# Altium PCB AdamPannel.PcbDoc (part 1 of 3)
Units mil, origin at the board's own origin, x right, y up, seen from the top; angles counter-clockwise.
Board outline 4173.23 x 3149.71 mil, 2 copper layers (Top Layer, Bottom Layer); 88 components, 73 nets, 388 pads, 166 vias.
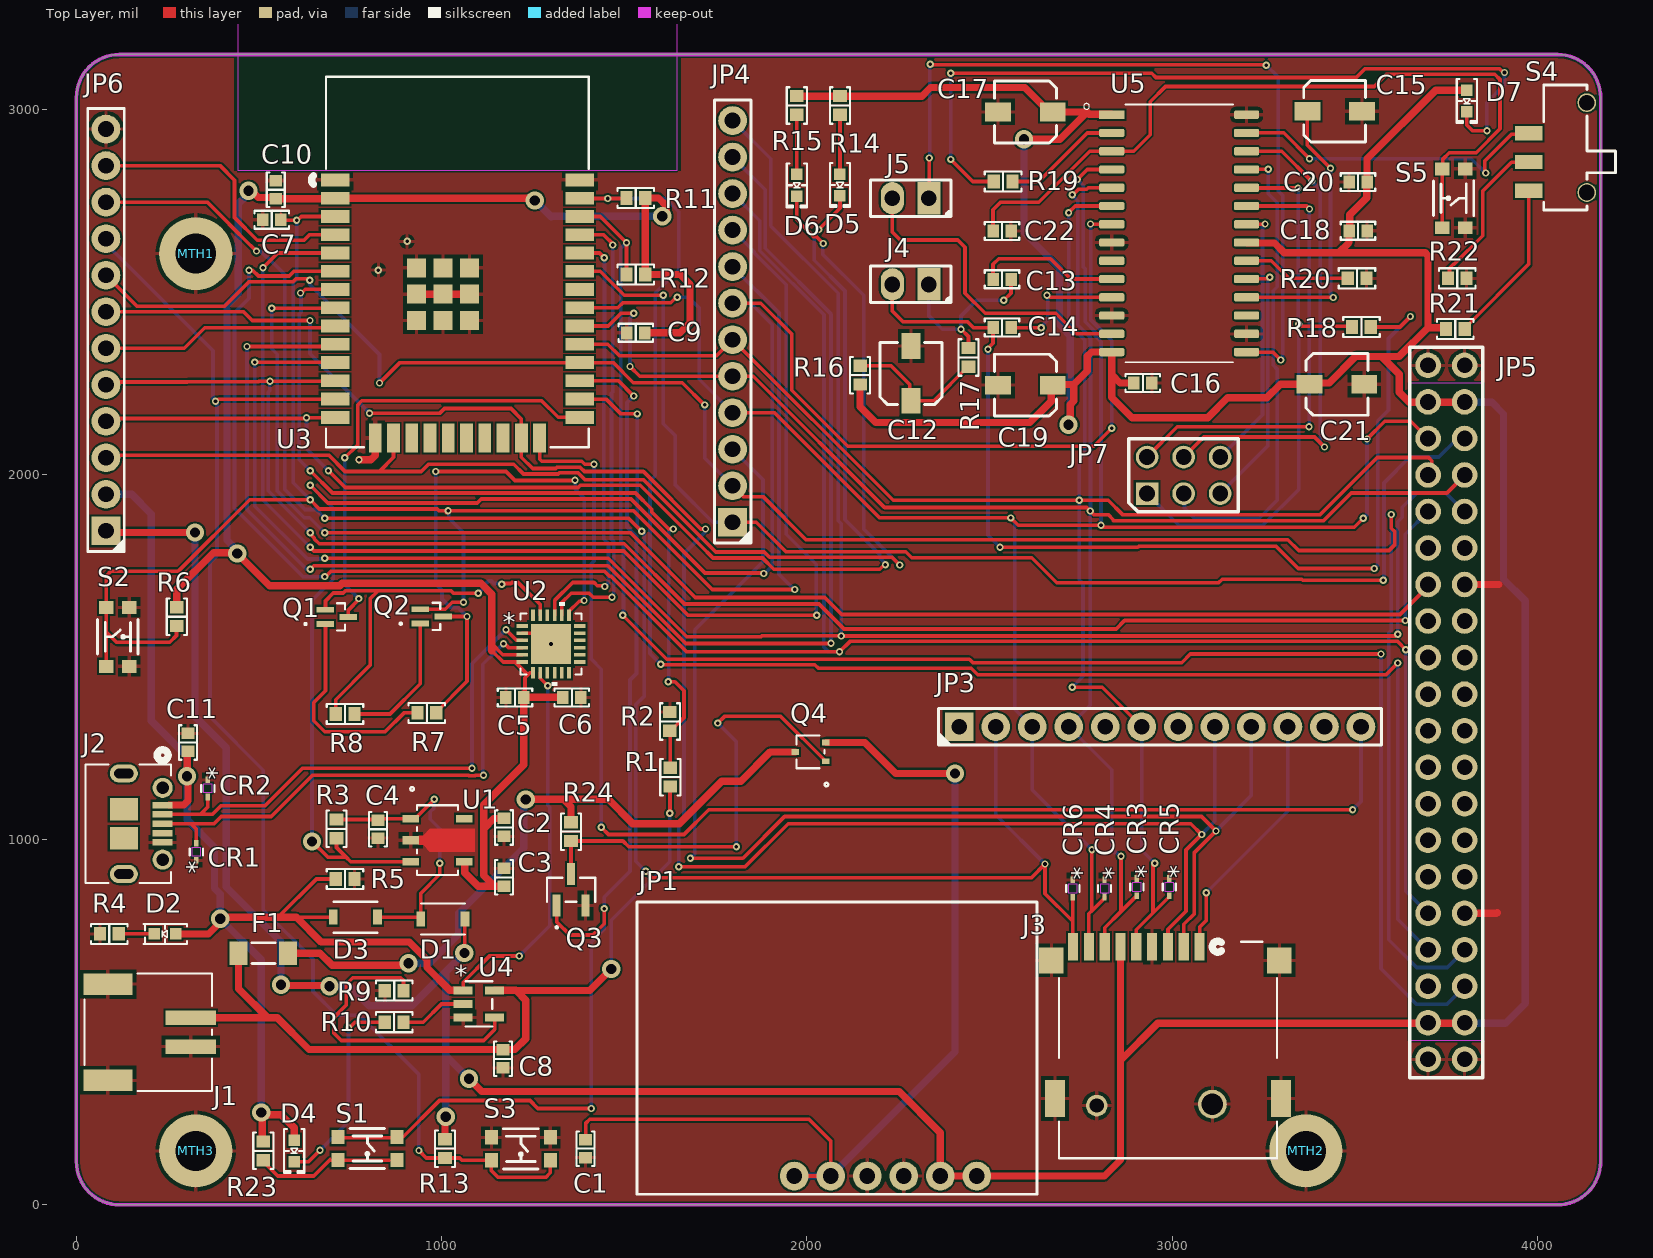
[diagram p0: Top Layer view]
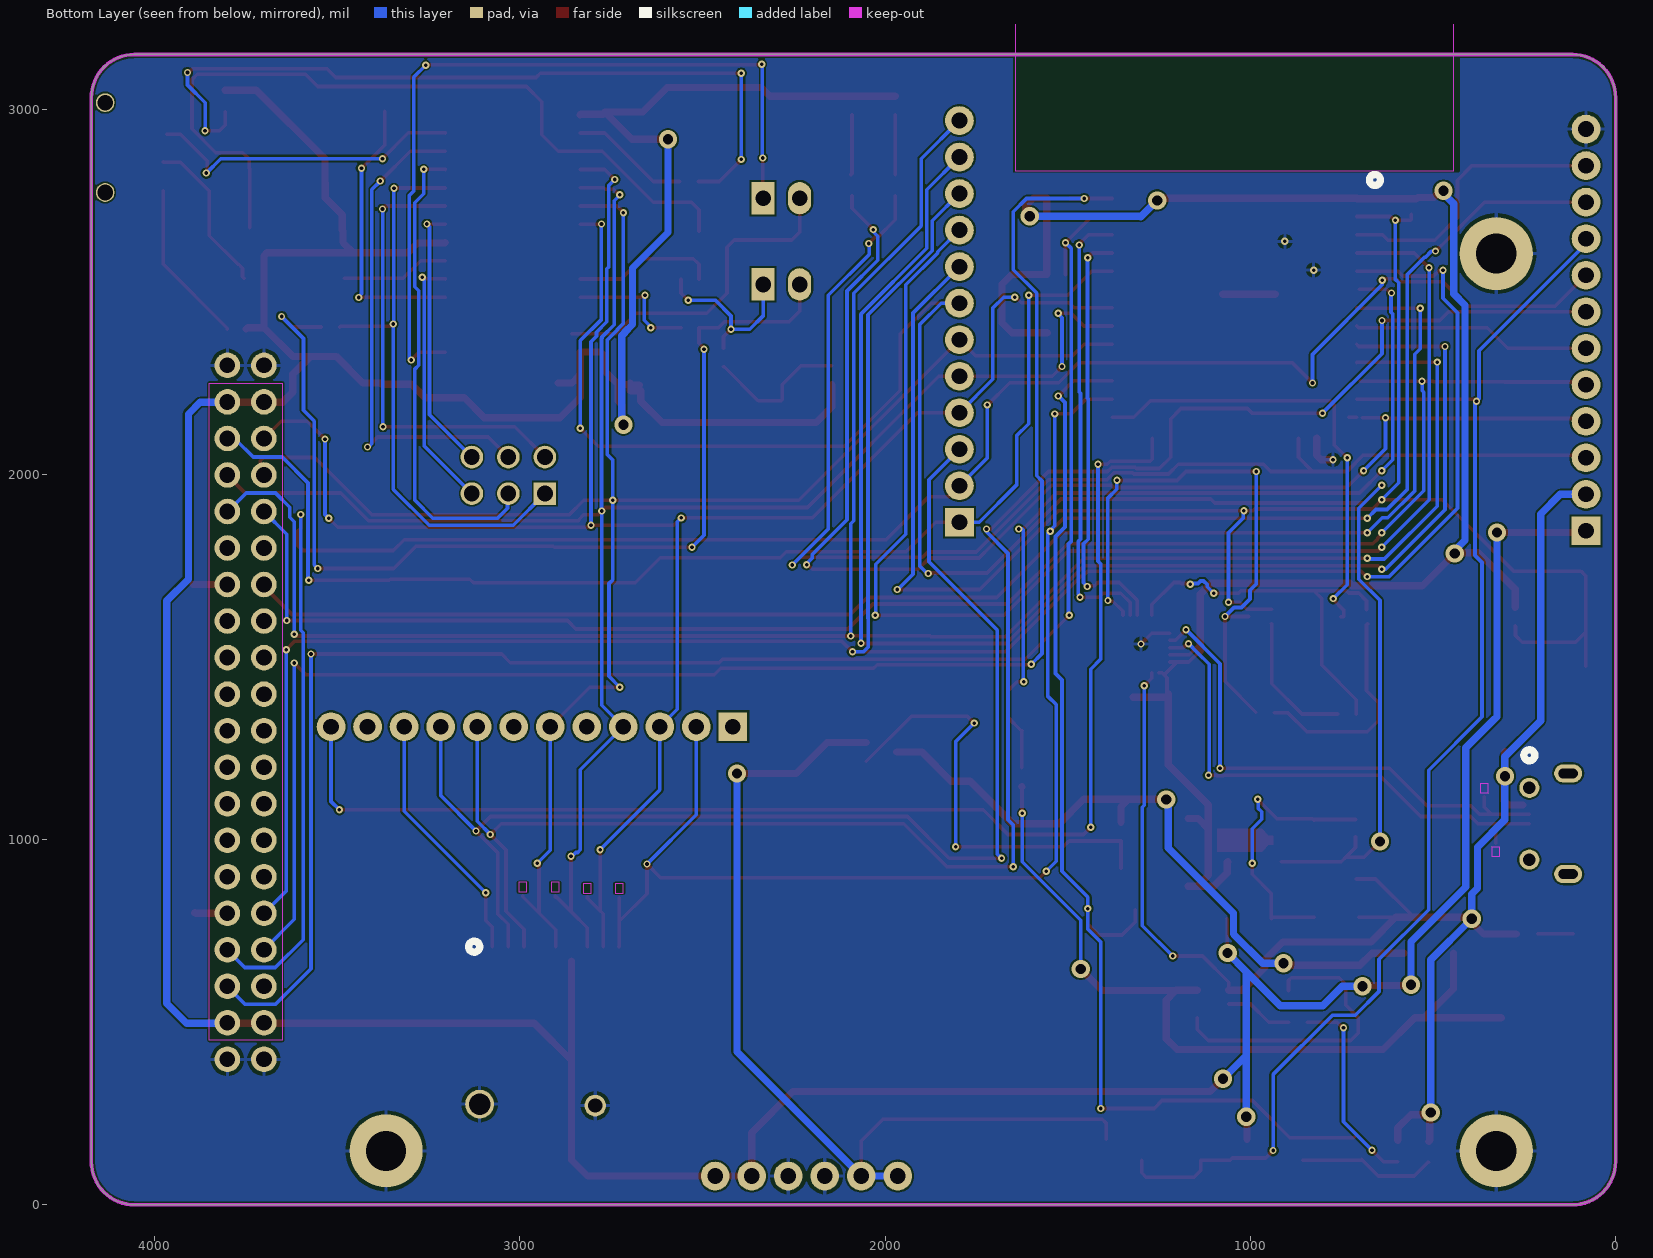
[diagram p1: Bottom Layer view, seen from below]
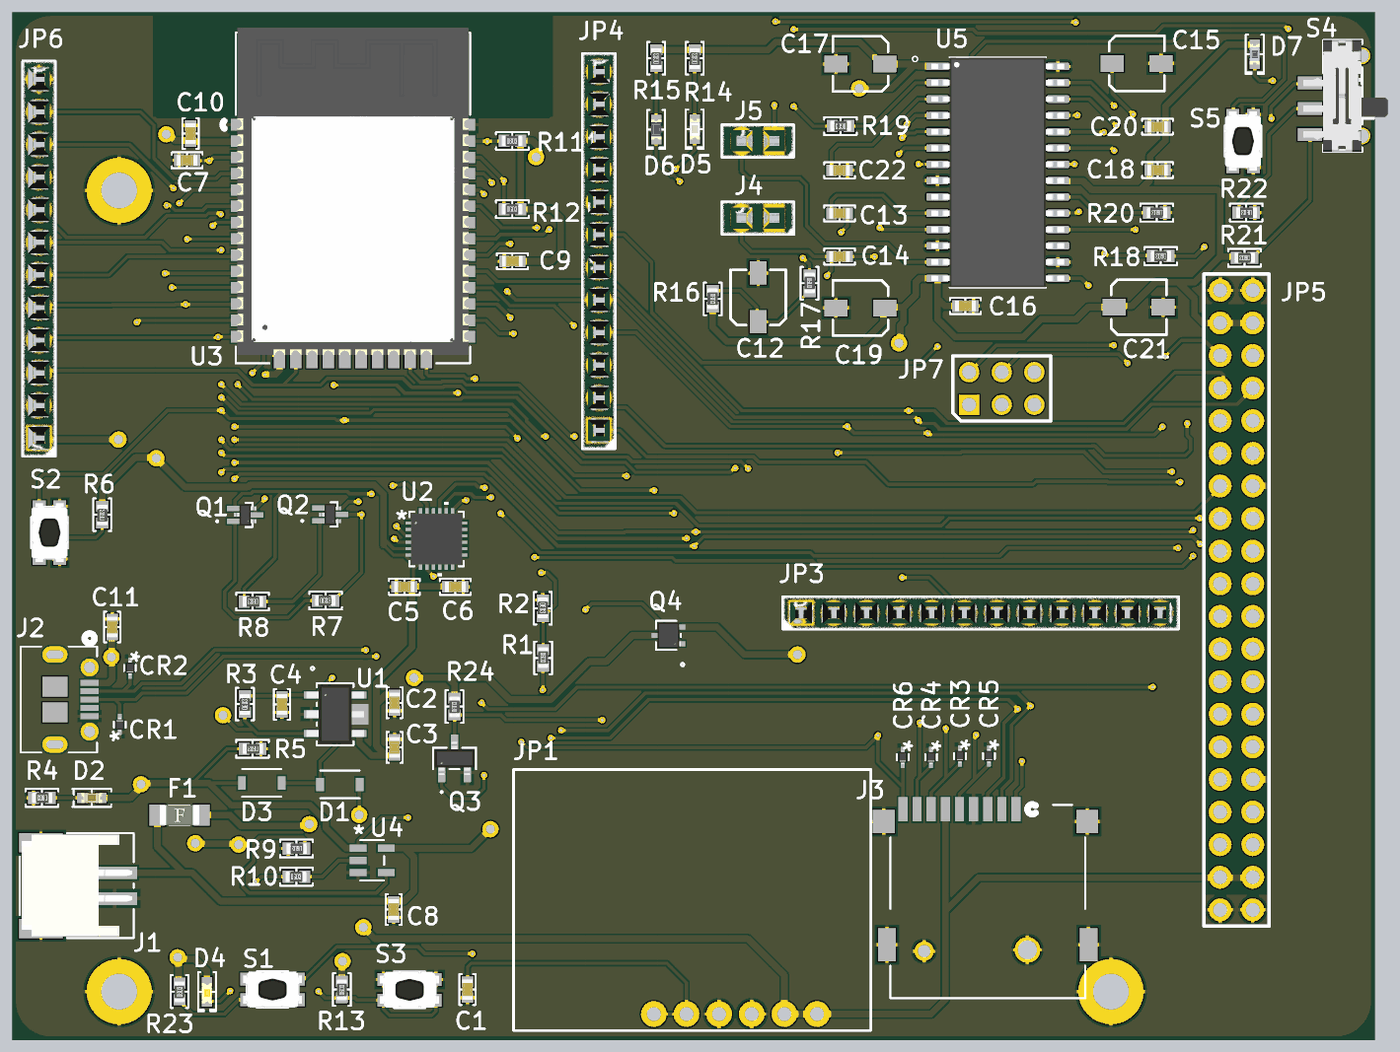
[diagram p3: 3D render of the assembled board from above, using the file's embedded part models]

## Layer stack, top to bottom
Top Solder: solder mask 0.4, Solder Resist, Dk 3.5
Top Layer: signal copper 1.4
Dielectric 1: dielectric 12.6, FR-4, Dk 4.8
Bottom Layer: signal copper 1.4
Bottom Solder: solder mask 0.4, Solder Resist, Dk 3.5

## Board outline
118.11,0 cw(c118.11,118.11) 0,118.11 0,3031.5 cw(c118.16,3031.55) 118.11,3149.71 4055.12,3149.71 cw(c4055.06,3031.55) 4173.23,3031.5 4173.23,118.11 cw(c4055.12,118.11) 4055.12,0

## Design rules (kind name [scope] priority, off if disabled: settings)
Clearance [All] p1: gap=5 ignorepadtopadclearanceinfootprint=FALSE
HoleSize [All] p1: absolutevalues=TRUE maxlimit=120 minlimit=10 maxpercent=80.000 minpercent=20.000
MinimumSolderMaskSliver [All] p1: minsoldermaskwidth=5
PolygonConnect [All] p1: connectstyle=Relief reliefconductorwidth=10 reliefentries=4 polygonreliefangle="90 Angle" airgapwidth=10
RoutingVias [All] p1: holewidth=28 width=50 viastyle="Through Hole" minholewidth=28 minwidth=50 maxholewidth=28 maxwidth=50
SilkToSilkClearance [All] p1 off: silktosilkclearance=10
SilkToSolderMaskClearance [IsPad] p1 off: minsilkscreentomaskgap=10 clearancetoexposedcopper=TRUE
SolderMaskExpansion [All] p1: expansion=4 istentingtop=FALSE
Width [All] p1: maxlimit=20 minlimit=10 preferedwidth=10
26 further rules are at their usual default settings.

## Classes and differential pairs
component class Sheet3: C12 C13 C14 C15 C16 C17 C18 C19 C20 C21 C22 D7 J4 J5 JP7 R16 R17 R18 R19 R20 R21 R22 S4 S5 U5
component class Sheet2: CR3 CR4 CR5 CR6 D5 D6 J3 JP3 JP4 JP6 R11 R12 R13 R14 R15 S3 U3
component class Sheet1: C1 C2 C3 C4 C5 C6 C7 C8 C9 C10 C11 CR1 CR2 D1 D2 D3 D4 F1 J1 J2 MTH1 MTH2 MTH3 Q1 Q2 Q3 Q4 R1 R2 R3 R4 R5 R6 R7 R8 R9 R10 R23 R24 S1 S2 U1 U2 U4

## Components (designator, comment, footprint, x,y, rotation, side; value= is the part's Value field where it differs from the comment)
C1 "10 µF" "CAP 0603" 1394.03,153.77 r90 top
C2 "10 µF" "CAP 0603" 1170.81,1033.14 r90 top
C3 "10 µF" "CAP 0603" 1170.81,896.55 r270 top
C4 "10 µF" "CAP 0603" 825.64,1028.43 r90 top
C5 "10 µF" "CAP 0603" 1200.82,1388.83 r0 top
C6 "100 nF" "CAP 0603" 1356.69,1388.89 r180 top
C7 "10 µF" "CAP 0603" 534.95,2696.91 r0 top
C8 "10 µF" "CAP 0603" 1167.85,399.52 r90 top
C9 "100 nF" "CAP 0603" 1531.59,2387.42 r0 top
C10 "100 nF" "CAP 0603" 545.78,2779 r270 top
C11 "100 nF" "CAP 0603" 305.24,1265.8 r270 top
C12 "4.7 µF" "CAP ALUM 4.3MM2" 2285.09,2276.3 r90 top
C13 "100 nF" "CAP 0603" 2534.39,2533.96 r0 top
C14 "100 nF" "CAP 0603" 2534.39,2401.57 r180 top
C15 "4.7 µF" "CAP ALUM 4.3MM2" 3445,2994.08 r0 top
C16 "100 nF" "CAP 0603" 2920,2250 r180 top
C17 "4700 nF" "CAP ALSMD ELEC 4.3MM H5.4MM" 2598.43,2992.13 r180 top value="4.7 µF"
C18 "100 nF" "CAP 0603" 3509.04,2666.73 r180 top
C19 "4700 nF" "CAP ALSMD ELEC 4.3MM H5.4MM" 2598.43,2244.09 r180 top value="4.7 µF"
C20 "100 nF" "CAP 0603" 3509.04,2799.89 r0 top
C21 "4700 nF" "CAP ALUM 4.3MM2" 3451.34,2246.5 r0 top value="4.7 µF"
C22 "100 nF" "CAP 0603" 2534.39,2666.34 r180 top
CR1 "CPDQ5V0-HF" CPDQ-M 328.61,966.4 r90 top
CR2 "CPDQ5V0-HF" CPDQ-M 360,1140 r270 top
CR3 "CPDQ5V0-HF" CPDQ-M 2903.54,869.96 r270 top
CR4 "CPDQ5V0-HF" CPDQ-M 2814.96,866.14 r270 top
CR5 "CPDQ5V0-HF" CPDQ-M 2992.13,869.96 r270 top
CR6 "CPDQ5V0-HF" CPDQ-M 2728.04,866.13 r270 top
D1 "PMEG2010ER,115" DIODE_PMEG2010ER,115_NEX 1003.4,782.75 r0 top
D2 "Red" "Red Led 0603" 242.26,741.99 r180 top
D3 "PMEG2010ER,115" DIODE_PMEG2010ER,115_NEX 763.89,787.4 r180 top
D4 "Yellow" "YELLOW LED 0603 - duplicate" 596.08,140.54 r270 top
D5 "Green" "Green LED 0603" 2090.55,2795.28 r270 top
D6 "Blue" "Blue LED 0603" 1972.44,2791.4 r270 top
D7 "Red" "Blue LED 0603" 3806.78,3022.03 r270 top
F1 "NANOSMDCH030F/24-02" "Fuse 500mA 0.6mm" 511.81,688.98 r0 top
J1 "CONN JST 2P SM 90DEG" S2B-PH-SM4-TB_LF__SN 196.85,472.44 r270 top
J2 "Micro USB" CONN_1050170001_MOL 141.94,1043.31 r270 top
J3 "693071020811" CONN9_020811_WRE 2708.66,114.17 r0 top
J4 "Microphone" "CONN FEM HEADER 2PIN" 2283.46,2519.68 r180 top
J5 "Speaker" "CONN FEM HEADER 2PIN" 2283.46,2755.91 r180 top
JP1 "Boost Regulator" HDR1X6 1965.35,78.74 r0 top
JP3 "HEADER 12" "CONN 12PIN FEMALE" 2965.87,1309.06 r90 top
JP4 "HEADER 12" "CONN 12PIN FEMALE" 1796.63,2417.6 r180 top
JP5 "CONNECTEUR ÉCRAN" J\40P 3800.79,2297.24 r270 top
JP6 "HEADER 12" "CONN 12PIN FEMALE" 81.02,2394.14 r180 top
JP7 "HEADER 6" J\6P 2931.5,1947.24 r0 top
MTH1 "NTENNA" "Mounting Hole"#1 285.43,2411.42 r0 top
MTH2 "ANTENNA" "Mounting Hole"#2 3366.14,147.64 r0 top
MTH3 "ANTENNA" "Mounting Hole"#3 118.11,118.11 r0 top
Q1 "MMBT2222ATT1G" SOT-416_1P65X0P9_ONS-M 712.71,1609.72 r90 top
Q2 "MMBT2222ATT1G" SOT-416_1P65X0P9_ONS-M 973.47,1610.84 r90 top
Q3 "MMBT2222AM3T5G" SOT_4C-E3-08_VIS-M 1354.35,862.6 r0 top
Q4 "IRFR5305TRLPBF" UFM_TOS 2010,1240 r90 top
R1 "100K" "RES 0603" 1626.04,1170.98 r270 top
R2 "100K" "RES 0603" 1624.99,1323.35 r270 top
R3 "100K" "RES 0603" 711.98,1029.2 r90 top
R4 "330" "RES 0603" 90.1,741.68 r180 top
R5 "100K" "RES 0603" 735.6,892.23 r180 top
R6 "10K" "RES 0603" 274.95,1610.22 r90 top
R7 "10K" "RES 0603" 959.53,1346.75 r0 top
R8 "10K" "RES 0603" 735.6,1343.8 r180 top
R9 "4K7" "RES 0603" 870.07,586.47 r180 top
R10 "330" "RES 0603" 870,500 r0 top
R11 "4K7" "RES 0603" 1531.59,2756.42 r0 top
R12 "4K7" "RES 0603" 1531.59,2547.12 r0 top
R13 "4K7" "RES 0603" 1009.22,153.77 r90 top
R14 "330" "RES 0603" 2090.55,3009.84 r90 top
R15 "330" "RES 0603" 1972.44,3009.84 r90 top
R16 "4K7" "RES 0603" 2145.67,2271.65 r270 top
R17 "4K7" "RES 0603" 2442.61,2319.95 r270 top
R18 "4K7" "RES 0603" 3518.41,2403.36 r180 top
R19 "150" "RES 0603" 2537.14,2801.67 r180 top
R20 "80K6" "RES 0603" 3506.28,2536.52 r180 top
R21 "100K" "RES 0603" 3775.37,2397.78 r180 top
R22 "100K" "RES 0603" 3780.72,2536.52 r180 top
R23 "100K" "RES 0603" 511.81,147.64 r90 top
R24 "100K" "RES 0603" 1354.33,1021.65 r90 top
S1 "KMR741NG ULC LFS" "Switch Lin SMD" 796.74,154.22 r180 top
S2 "KMR741NG ULC LFS" "Switch Lin SMD" 113.24,1555.13 r270 top
S3 "KMR741NG ULC LFS" "Switch Lin SMD" 1216.79,153.24 r180 top
S4 "450405020524" "SL 3Pos Switch" 4076.42,2894.59 r270 top
S5 "KMR741NG ULC LFS" "Switch Lin SMD" 3770.95,2755.81 r90 top
U1 "AP2112K-3.3TRG1" AP2112R5-3.3TRG1_DIO 988.8,998.2 r270 top
U2 "CP2104-F03-GMR" QFN_F03-GMR_SIL-M 1299.45,1535.43 r0 top
U3 "ESP32-WROOM-32 (8MB)" ESP32-WROOM-32D 1043.31,2581.35 r0 top
U4 "MCP73831T-2ACI/OT" SOT23_MCP73831T-2ACI/OT_HNW 1102.14,549.84 r0 top
U5 "ISD1760SY" ISD1760SY 3019.57,2660.2 r0 top

## Footprints (in the part's own frame and the unit in brackets; to place one, negate y for a bottom-side part, rotate by r counter-clockwise, add the part's x,y. Pads: shape width x height; smd on the part's side, far side on the other; paste and mask are expansions set on the pad)
AP2112R5-3.3TRG1_DIO [mil]
  rect 21x45 smd paste+0 mask+0: 1(-59.06,-73.5) 3(59.06,-73.5) 4(59.06,73.5) 5(-59.06,73.5)
  rect 24x45 smd paste+0 mask+0: 2(0,-73.5)
  Top Layer region: 12,-51 -12,-51 -12,-39 -31.5,-21.5 -31.5,102 -10.5,102 10.5,102 31.5,102 31.5,-21.5 12,-39
  silkscreen extent -145,-74 96,56, body extent -91,-88 91,88, height 65
"Blue LED 0603" [mm] "Blue LED"
  rect 0.8x0.8 smd: 1(-0.75,0) 2(0.75,0)
  silkscreen extent -1.52,-0.7 1.52,0.7, body extent -0.8,-0.4 0.8,0.4, height 0.53
"CAP 0603" [mm] "Cap ceramique 0603"
  rect 0.8x0.9 smd: 1(-0.625,0) 2(0.625,0)
  silkscreen extent -1.2,-0.63 1.2,0.63, body extent -0.8,-0.41 0.8,0.41, height 0.82
"CAP ALSMD ELEC 4.3MM H5.4MM" [mm] "Aluminum SMD Electrolytic Capacitor, 4.30mm Land Size, 4.00mm Diameter, 5.40mm Height, 4.60mm Maximum Leads Span"
  rect 1.8x1.3 smd: 1(-1.9,0) 2(1.9,0)
  silkscreen extent -2.15,-2.15 2.15,2.15, body extent -2.3,-2.15 2.3,2.15, height 5.4
"CAP ALUM 4.3MM2" [mm]
  rect 1.8x1.3 smd: 1(-1.9,0) 2(1.9,0)
  silkscreen extent -2.15,-2.15 2.15,2.15, body extent -2.3,-2.15 2.3,2.15, height 5.4
CONN9_020811_WRE [mil]
  rect 28x75 smd paste+0 mask+0: 1(366.54,592.56) 2(323.23,592.56) 3(279.92,592.56) 4(236.61,592.56) 5(193.31,592.56) 6(150,592.56) 7(106.69,592.56) 8(63.39,592.56) 9(20.08,592.56)
  rect 67x71 smd: 10(-38.98,555.08) 11(585.04,555.08)
  rect 55x102 smd: 12(-29.13,177.13) 13(588.98,177.13)
  round 59 hole 39: 14(85.04,157.44)
  round 78.74 hole 59.06: 15(401.57,161.42)
  silkscreen extent -19,13 578,608, body extent 367,593 377,603, height 10
"CONN 12PIN FEMALE" [mm] "12 pin female conn 0.5mm spacing"
  rect 2x2 hole 1.092: 1(0,13.943)
  round 2 hole 1.092: 2(0,11.403) 3(0,8.863) 4(0,6.323) 5(0,3.783) 6(0,1.243) 7(0,-1.297) 8(0,-3.837) 9(0,-6.377) 10(0,-8.917) 11(0,-11.457) 12(0,-13.997)
  silkscreen extent -1.27,-15.43 1.27,15.4, body extent -1.25,-15.47 1.25,15.41, height 8.5
"CONN FEM HEADER 2PIN" [mm]
  rect 1.6x2.25 hole 1.092: 1(-1.285,-0.006)
  oval 1.6x2.25 hole 1.092: 2(1.255,-0.006)
  silkscreen extent -2.81,-1.28 2.79,1.26, body extent -2.81,-1.21 2.78,1.2, height 8.51
CONN_1050170001_MOL [mil]
  rect 18x55 smd paste+0 mask+0: 1(-51.18,94.28) 2(-25.59,94.28) 3(0,94.28) 4(25.59,94.28) 5(51.18,94.28)
  rect 61x77 smd: 6(-39.37,-12.02) 7(39.37,-12.02)
  round 55 hole 35 mask+0: 8(-98.43,94.28) 9(98.43,94.28)
  oval 50x77 hole 26 slot 53 at 90 deg mask+0: S_1(-137.8,-12.02) S_2(137.8,-12.02)
  Multi-Layer lines w26: 137.8,-25.52 137.8,1.48 ; -137.8,-25.52 -137.8,1.48
  silkscreen extent -202,-117 163,117, body extent 0,0 10,10, height 10
CPDQ-M [mil]
  rect 18x12 smd paste+0 mask+0: 1(-23.5,0) 2(23.5,0)
  Top Layer keep-out region: -12.5,-11 -12.5,11 12.5,11 12.5,-11
  Keep-Out Layer region: -12.5,-11 -12.5,11 12.5,11 12.5,-11
  silkscreen extent -9,-18 9,18, body extent -21,-13 21,13, height 32
DIODE_PMEG2010ER,115_NEX [mil]
  rect 24x41 smd paste+0 mask+0: 1(-60.83,0) 2(60.83,0)
  silkscreen extent -60,-42 60,42, body extent 0,0 10,10, height 10
ESP32-WROOM-32D [mil] "ESP32-WROOM-32D"
  rect 79x35 smd paste+0 mask+0: 1(-334.65,224.55) 2(-334.65,174.55) 3(-334.65,124.55) 4(-334.65,74.55) 5(-334.65,24.55) 6(-334.65,-25.45) 7(-334.65,-75.45) 8(-334.65,-125.45) 9(-334.65,-175.45) 10(-334.65,-225.45) 11(-334.65,-275.45) 12(-334.65,-325.45) 13(-334.65,-375.45) 14(-334.65,-425.45) 25(334.65,-425.45) 26(334.65,-375.45) 27(334.65,-325.45) 28(334.65,-275.45) 29(334.65,-225.45) 30(334.65,-175.45) 31(334.65,-125.45) 32(334.65,-75.45) 33(334.65,-25.45) 34(334.65,24.55) 35(334.65,74.55) 36(334.65,124.55) 37(334.65,174.55) 38(334.65,224.55)
  rect 35x79 smd: 15(-225,-482.18) 16(-175,-482.18) 17(-125,-482.18) 18(-75,-482.18) 19(-25,-482.18) 20(25,-482.18) 21(75,-482.18) 22(125,-482.18) 23(175,-482.18) 24(225,-482.18)
  rect 52x52 smd: 39(-111.78,-15.96) 40(-39.54,-15.96) 41(32.71,-15.96) 42(-111.78,-88.2) 43(-39.54,-88.2) 44(32.71,-88.2) 45(-111.78,-160.44) 46(-39.54,-160.44) 47(32.71,-160.44)
  Keep-Out Layer region: -600,700 600,700 600,250 -600,250
  silkscreen extent -399,-507 360,507, body extent -354,-482 354,522, height 128
"Fuse 500mA 0.6mm" [mm]
  rect 1.25x1.65 smd: 1(-1.725,0) 2(1.725,0)
  silkscreen extent -0.8,-0.72 0.8,0.72, body extent -1.55,-0.77 1.55,0.78, height 0.76
"Green LED 0603" [mm] "Green led SMD"
  rect 0.8x0.8 smd: 1(-0.671,0) 2(0.829,0)
  silkscreen extent -1.45,-0.7 1.6,0.7, body extent -0.72,-0.4 0.88,0.4, height 0.53
HDR1X6 [mm] "Connector; Header; 6 Position"
  round 2 hole 1.092: 1(0,0) 2(2.54,0) 3(5.08,0) 4(7.62,0) 5(10.16,0) 6(12.7,0)
  silkscreen extent -10.92,-1.27 16.89,19.05
ISD1760SY [mm] "Enregistreur Speaker programable SPI-I2C"
  rect 1.75x0.58 smd: 1(-4.697,8.241)
  rrect40% 1.75x0.58 smd: 2(-4.697,6.971) 3(-4.697,5.701) 4(-4.697,4.431) 5(-4.697,3.161) 6(-4.697,1.891) 7(-4.697,0.621) 8(-4.697,-0.649) 9(-4.697,-1.919) 10(-4.697,-3.189) 11(-4.697,-4.459) 12(-4.697,-5.729) 13(-4.697,-6.999) 14(-4.697,-8.269) 15(4.683,-8.269) 16(4.683,-6.999) 17(4.683,-5.729) 18(4.683,-4.459) 19(4.683,-3.189) 20(4.683,-1.919) 21(4.683,-0.649) 22(4.683,0.621) 23(4.683,1.891) 24(4.683,3.161) 25(4.683,4.431) 26(4.683,5.701) 27(4.683,6.971) 28(4.683,8.241)
  silkscreen extent -6.65,-8.98 3.75,9.02, body extent -5.17,-8.96 5.16,8.94, height 2.65
J\6P [mil]
  rect 62x62 hole 43: 1(0,0)
  round 62 hole 43: 2(0,100) 3(100,0) 4(100,100) 5(200,0) 6(200,100)
  silkscreen extent -50,-50 250,150
J\40P [mil]
  round 70 hole 43: 1(-1,0) 2(-1,-100) 3(99,0) 4(99,-100) 5(199,0) 6(199,-100) 7(299,0) 8(299,-100) 9(399,0) 10(399,-100) 11(499,0) 12(499,-100) 13(599,0) 14(599,-100) 15(699,0) 16(699,-100) 17(799,0) 18(799,-100) 19(899,0) 20(899,-100) 21(999,0) 22(999,-100) 23(1099,0) 24(1099,-100) 25(1199,0) 26(1199,-100) 27(1299,0) 28(1299,-100) 29(1399,0) 30(1399,-100) 31(1499,0) 32(1499,-100) 33(1599,0) 34(1599,-100) 35(1699,0) 36(1699,-100) 37(1799,0) 38(1799,-100) 39(1899,0) 40(1899,-100)
  silkscreen extent -51,-150 1949,50
"Mounting Hole"#1 [mm]
  round 5.08 hole 2.794: 1(1.05,4.9)
"Mounting Hole"#2 [mm]
  round 5.08 hole 2.794: 1(0,0)
"Mounting Hole"#3 [mm]
  round 5.08 hole 2.794: 1(5.3,0.75)
QFN_F03-GMR_SIL-M [mil]
  rect 32x10 smd paste+0 mask+0: 1(-78.5,49.23) 2(-78.5,29.54) 3(-78.5,9.85) 4(-78.5,-9.85) 5(-78.5,-29.53) 6(-78.5,-49.22) 13(78.5,-49.22) 14(78.5,-29.53) 15(78.5,-9.85) 16(78.5,9.85) 17(78.5,29.54) 18(78.5,49.23)
  rect 10x32 smd paste+0 mask+0: 7(-49.22,-78.5) 8(-29.54,-78.5) 9(-9.85,-78.5) 10(9.85,-78.5) 11(29.54,-78.5) 12(49.22,-78.5) 19(49.22,78.5) 20(29.54,78.5) 21(9.85,78.5) 22(-9.85,78.5) 23(-29.54,78.5) 24(-49.22,78.5)
  rect 110x110 smd paste-54.5 mask+0: 25(0,0)
  silkscreen extent -84,-114 84,114, body extent -79,-79 79,79, height 32
"Red Led 0603" [mm] "red led smd"
  rect 0.8x0.8 smd: 1(-0.756,0.008) 2(0.744,0.008)
  silkscreen extent -1.53,-0.69 1.49,0.71, body extent -0.81,-0.39 0.79,0.41, height 0.53
"RES 0603" [mm]
  rect 0.85x0.95 smd: 1(-0.65,0) 2(0.65,0)
  silkscreen extent -1.27,-0.7 1.27,0.7, body extent -0.83,-0.4 0.77,0.4, height 0.45
S2B-PH-SM4-TB_LF__SN [mil] "Conn 2 pin smd horizontal S2B"
  rect 39x138 smd paste+0 mask+0: 1(-39.37,116.35) 2(39.37,116.35)
  rect 59x134 smd: 3(-131.89,-110.03) 4(131.89,-110.03)
  silkscreen extent -161,-175 160,174, body extent -156,-169 155,169, height 217
"SL 3Pos Switch" [mm] "Sliding 3 pos switch"
  rect 1x1.9 smd: 1(3,-2.55) 2(1,-2.55) 3(-1,-2.55)
  round 1.3 hole 1.092: MH(-3.125,1.5) MH(3.125,1.5)
  silkscreen extent -4.35,-1.5 4.35,3.5, body extent -4.45,-3.05 4.45,3.5, height 1.98
SOT23_MCP73831T-2ACI/OT_HNW [mil]
  rect 52x22 smd paste+0 mask+0: 1(-43.12,37.4) 2(-43.12,0) 3(-43.12,-37.4) 4(43.12,-37.4) 5(43.12,37.4)
  silkscreen extent -36,-62 36,62, body extent 0,0 10,10, height 10
SOT-416_1P65X0P9_ONS-M [mil]
  rect 16x48 smd paste+0 mask+0: 1(-19.69,31.5) 2(19.68,31.5) 3(0,-31.5)
  silkscreen extent -38,-23 38,88, body extent -33,-34 33,34, height 35
SOT_4C-E3-08_VIS-M [mil]
  rect 22x60 smd paste+0 mask+0: 1(-39.37,-43) 2(39.37,-43) 3(0,43)
  silkscreen extent -66,-106 66,33, body extent -61,-51 61,51, height 45
"Switch Lin SMD" [mm]
  rect 0.9x1 smd mask+0.1: 1(-2.05,0.802) 2(2.05,0.802) 3(-2.05,-0.798) 4(2.05,-0.798)
  silkscreen extent -1.2,-1.4 1.2,1.4, body extent -2.3,-1.4 2.3,1.4, height 2.5
UFM_TOS [mil]
  rect 16x20 smd paste+0 mask+0: 1(-25.59,-41.5) 2(25.59,-41.5) 3(0,41.5)
  silkscreen extent -94,-49 44,38, body extent -39,-38 39,38, height 32
"YELLOW LED 0603 - duplicate" [mm] "Yellow led 0603 SMD"
  rect 0.8x0.8 smd: 1(-0.925,0) 2(0.575,0)
  silkscreen extent -1.7,-0.7 1.35,0.7, body extent -0.85,-0.4 0.75,0.4, height 0.53

## Part data
C1 C2 C3 C4 C5 C7 C8: library part GRM188C81A106MA73D, "CAP CER 10UF 10V X6S 0603", Device Package="0603 (1608 Metric)", manufacturer="Murata Electronics", Operating Temperature="-55°C ~ 105°C", Supplier Part Number 1=490-7197-1-ND, Temperature Coefficient=X6S, Tolerance=±20%, Voltage - Rated=10V, Applications="General Purpose", Capacitance="10 µF", componentlink1description=Datasheet, componentlink1url=https://www.murata.com/~/media/webrenewal/support/library/catalog/products/capacitor/mlcc/c02e.ashx?la=en-us, componentlink2description="DigiKey Link", componentlink2url=https://www.digikey.com/en/products/detail/murata-electronics/GRM188C81A106MA73D/3900461, lastupdated="2023-03-27 19:07:26", Lifecycle Status=Active, Manufacturer Part Number 1=GRM188C81A106MA73D, Minimum Order=1, Mounting Type="Surface Mount, MLCC", Package / Case="0603 (1608 Metric)", packaging=TapeAndReel, Part Number=GRM188C81A106MA73D, Part Status=Active, partid=2456, price=0.04, series=GRM, Size / Dimension="0.063\" L x 0.031\" W (1.60mm x 0.80mm)", Supplier 1=DigiKey, Thickness (Max)="0.039\" (1.00mm)"
C6 C9 C10 C11: library part GRM188C81A106MA73D, "CAP CER 10UF 10V X6S 0603", Capacitance="10 µF", Device Package="0603 (1608 Metric)", manufacturer="Murata Electronics", Operating Temperature="-55°C ~ 105°C", Supplier Part Number 1=490-7197-1-ND, Temperature Coefficient=X6S, Tolerance=±20%, Voltage - Rated=10V, Applications="General Purpose", componentlink1description=Datasheet, componentlink1url=https://www.murata.com/~/media/webrenewal/support/library/catalog/products/capacitor/mlcc/c02e.ashx?la=en-us, componentlink2description="DigiKey Link", componentlink2url=https://www.digikey.com/en/products/detail/murata-electronics/GRM188C81A106MA73D/3900461, lastupdated="2023-03-27 19:07:26", Lifecycle Status=Active, Manufacturer Part Number 1=GRM188C81A106MA73D, Minimum Order=1, Mounting Type="Surface Mount, MLCC", Package / Case="0603 (1608 Metric)", packaging=TapeAndReel, Part Number=GRM188C81A106MA73D, Part Status=Active, partid=2456, price=0.04, series=GRM, Size / Dimension="0.063\" L x 0.031\" W (1.60mm x 0.80mm)", Supplier 1=DigiKey, Thickness (Max)="0.039\" (1.00mm)"
C12 C15: library part EMVE350ADA4R7MD55G, "CAP ALUM 4.7UF 20% 35V SMD", Device Package="Radial, Can - SMD", Lifetime @ Temp.="1000 Hrs @ 105°C", manufacturer="United Chemi-Con", Operating Temperature="-40°C ~ 105°C", Ripple Current @ Low Frequency="16 mA @ 120 Hz", Supplier Part Number 1=565-2229-1-ND, Tolerance=±20%, Voltage - Rated="35 V", Applications="General Purpose", Capacitance="4.7 µF", componentlink1description=Datasheet, componentlink1url=//media.digikey.com/pdf/Data%20Sheets/United%20Chemi-Con%20PDFs/MVE%20Series.pdf, componentlink2description="DigiKey Link", componentlink2url=https://www.digikey.com/en/products/detail/united-chemi-con/EMVE350ADA4R7MD55G/756875, Height - Seated (Max)="0.205\" (5.20mm)", lastupdated="2023-04-04 19:53:03", Lifecycle Status=Active, Minimum Order=1, Mounting Type="Surface Mount", Package / Case="Radial, Can - SMD", packaging=TapeAndReel, Part Number=EMVE350ADA4R7MD55G, Part Status=Active, partid=7039, Polarization=Polar, price=0.06, series="Alchip™- MVE", Size / Dimension="0.157\" Dia (4.00mm)", Supplier 1=DigiKey, Surface Mount Land Size="0.169\" L x 0.169\" W (4.30mm x 4.30mm)"
C13 C14 C16 C18 C20 C22: library part CS0603KRX7R7BB104, "CAP CER 0.1UF 16V X7R 0603", Capacitance="0.1 µF", Device Package="0603 (1608 Metric)", manufacturer=Yageo, Operating Temperature="-55°C ~ 125°C", Supplier Part Number 1=311-3560-1-ND, Temperature Coefficient=X7R, Tolerance=±10%, Voltage - Rated=16V, Applications="Boardflex Sensitive", componentlink1description=Datasheet, componentlink1url=http://www.yageo.com/NewPortal/yageodocoutput?fileName=/pdf/MLCC/UPY-ST_NPOX7R_16V-to-3KV_5.pdf, componentlink2description="DigiKey Link", componentlink2url=https://www.digikey.com/en/products/detail/yageo/CS0603KRX7R7BB104/6097897, Features="Soft Termination", lastupdated="2023-04-02 19:09:22", Lifecycle Status=Active, Minimum Order=1, Mounting Type="Surface Mount, MLCC", Package / Case="0603 (1608 Metric)", packaging=TapeAndReel, Part Number=CS0603KRX7R7BB104, Part Status=Active, partid=2286, price=0.01, series=CS, Size / Dimension="0.063\" L x 0.031\" W (1.60mm x 0.80mm)", Supplier 1=DigiKey, Thickness (Max)="0.037\" (0.95mm)"
C17 C19 C21: library part EMVE350ADA4R7MD55G, "CAP ALUM 4.7UF 20% 35V SMD", Capacitance="4.7 µF", Device Package="Radial, Can - SMD", Lifetime @ Temp.="1000 Hrs @ 105°C", manufacturer="United Chemi-Con", Operating Temperature="-40°C ~ 105°C", Ripple Current @ Low Frequency="16 mA @ 120 Hz", Supplier Part Number 1=565-2229-1-ND, Tolerance=±20%, Voltage - Rated="35 V", Applications="General Purpose", componentlink1description=Datasheet, componentlink1url=//media.digikey.com/pdf/Data%20Sheets/United%20Chemi-Con%20PDFs/MVE%20Series.pdf, componentlink2description="DigiKey Link", componentlink2url=https://www.digikey.com/en/products/detail/united-chemi-con/EMVE350ADA4R7MD55G/756875, Height - Seated (Max)="0.205\" (5.20mm)", lastupdated="2023-04-04 19:53:03", Lifecycle Status=Active, Minimum Order=1, Mounting Type="Surface Mount", Package / Case="Radial, Can - SMD", packaging=TapeAndReel, Part Number=EMVE350ADA4R7MD55G, Part Status=Active, partid=7039, Polarization=Polar, price=0.06, series="Alchip™- MVE", Size / Dimension="0.157\" Dia (4.00mm)", Supplier 1=DigiKey, Surface Mount Land Size="0.169\" L x 0.169\" W (4.30mm x 4.30mm)"
CR1 CR2 CR3 CR4 CR5 CR6: "Diode TVS bidirectionnel", Mfr_Name=Comchip
D1 D3: "Diode shotkey", Manufacturer Part Number 1=PMEG2010ER115, Supplier Part Number 1=1727-5192-1-ND, ADAM Inventory Number 1=E00031, Supplier 1=Digi-Key
D2: library part "0603 RED LED", "0603 RED LED", Current - Test=20mA, Device Package="0603 (1608 Metric)", Lens Color=Colorless, manufacturer="American Bright Optoelectronics Corporation", Manufacturer Part Number 1=BL-HUB36A-AV-TRB, Millicandela Rating=94mcd, Supplier Device Package=0603, Supplier Part Number 1=BL-HUB36A-AV-TRBCT-ND, Voltage - Forward (Vf) (Typ)=2.2V, ADAM Inventory Number 1=E00069, Color=Red, componentlink1description=Datasheet, componentlink1url=https://americanbrightled.com/pdffiles/smt/BL-HUB36A-AV-TRB.pdf, componentlink2description="DigiKey Link", componentlink2url=https://www.digikey.com/en/products/detail/american-bright-optoelectronics-corporation/BL-HUB36A-AV-TRB/9678174, Configuration=Standard, Height (Max)=0.70mm, lastupdated="2023-03-27 19:53:19", Lens Style="Rectangle with Flat Top", Lens Transparency=Clear, Lifecycle Status=Active, Minimum Order=1, Mounting Type="Surface Mount", Package / Case="0603 (1608 Metric)", packaging=TapeAndReel, Part Status=Active, partid=1020, price=0.04, series=-, Size / Dimension="1.60mm L x 0.80mm W", Supplier 1=DigiKey, Viewing Angle=120°, Wavelength - Dominant=632nm, Wavelength - Peak=645nm
D4: library part "0603 YELLOW LED", "0603 YELLOW", Current - Test=20mA, Device Package="0603 (1608 Metric)", Lens Color=Colorless, manufacturer="American Bright Optoelectronics Corporation", Manufacturer Part Number 1=BL-HKC36D-AV-TRB, Millicandela Rating=120mcd, Supplier Device Package=0603, Supplier Part Number 1=BL-HKC36D-AV-TRBCT-ND, Voltage - Forward (Vf) (Typ)=2V, ADAM Inventory Number 1=E00068, Color=Yellow, componentlink1description=Datasheet, componentlink1url=http://americanbrightled.com/pdffiles/smt/BL-HKC36D-AV-TRB.pdf, componentlink2description="DigiKey Link", componentlink2url=https://www.digikey.com/en/products/detail/american-bright-optoelectronics-corporation/BL-HKC36D-AV-TRB/9678175, Configuration=0603, Height (Max)=0.85mm, lastupdated="2023-03-27 19:54:01", Lens Size="0.87mm x 0.80mm", Lens Style="Rectangle with Flat Top", Lens Transparency=Clear, Lifecycle Status=Active, Minimum Order=1, Mounting Type="Surface Mount", Package / Case="0603 (1608 Metric)", packaging=TapeAndReel, Part Status=Active, partid=82, price=0.04, series=-, Size / Dimension="1.60mm L x 0.80mm W", Supplier 1=DigiKey, Viewing Angle=120°, Wavelength - Dominant=589nm, Wavelength - Peak=590nm
D5: library part "0603 GREEN LED", "LED GREEN 0603 SMD", Current - Test=20mA, Device Package="0603 (1608 Metric)", Lens Color=1.24mm, manufacturer=Dialight, Manufacturer Part Number 1=5973316507F, Millicandela Rating=34mcd, Supplier Device Package=0603, Supplier Part Number 1=350-4373-1-ND, Voltage - Forward (Vf) (Typ)=2V, ADAM Inventory Number 1=E00070, Color=Green, componentlink1description=Datasheet, componentlink1url=http://www.dialightsignalsandcomponents.com/Assets/Drawings/2D_Drawings_DrawingDetailedSpec/NewDrawings/C18371C.pdf, componentlink2description="DigiKey Link", componentlink2url=https://www.digikey.com/en/products/detail/dialight/5973316507F/9385428, Configuration=Standard, Height (Max)=1.24mm, lastupdated="2023-03-27 19:52:49", Lens Style="Round with Domed Top", Lifecycle Status=Active, Minimum Order=1, Mounting Type="Surface Mount", Package / Case="0603 (1608 Metric)", packaging=TapeAndReel, Part Status=Active, partid=587, price=0.13, series=597, Size / Dimension="1.60mm L x 0.80mm W", Supplier 1=DigiKey, Wavelength - Dominant=560nm
D6: library part "0603 BLUE LED", "Blue 470nm LED Indication - Discrete 3.3V 0603 (1608 Metric)", Manufacturer Part Number 1=APT1608LVBC/D, Supplier Part Number 1=754-1933-1-ND, ADAM Inventory Number 1=E00071, Supplier 1=Digi-Key
D7: library part BL-HUB36A-AV-TRB, "0603 RED", Current - Test=20mA, Device Package="0603 (1608 Metric)", Lens Color=Colorless, manufacturer="American Bright Optoelectronics Corporation", Millicandela Rating=94mcd, Supplier Device Package=0603, Supplier Part Number 1=BL-HUB36A-AV-TRBCT-ND, Voltage - Forward (Vf) (Typ)=2.2V, Color=Red, componentlink1description=Datasheet, componentlink1url=https://americanbrightled.com/pdffiles/smt/BL-HUB36A-AV-TRB.pdf, componentlink2description="DigiKey Link", componentlink2url=https://www.digikey.com/en/products/detail/american-bright-optoelectronics-corporation/BL-HUB36A-AV-TRB/9678174, Configuration=Standard, Height (Max)=0.70mm, lastupdated="2023-03-27 19:53:19", Lens Style="Rectangle with Flat Top", Lens Transparency=Clear, Lifecycle Status=Active, Minimum Order=1, Mounting Type="Surface Mount", Package / Case="0603 (1608 Metric)", packaging=TapeAndReel, Part Number=BL-HUB36A-AV-TRB, Part Status=Active, partid=1020, price=0.04, series=-, Size / Dimension="1.60mm L x 0.80mm W", Supplier 1=DigiKey, Viewing Angle=120°, Wavelength - Dominant=632nm, Wavelength - Peak=645nm
F1: "No Description Available", Mfr_Name="Littelfuse Inc"
J1: "CONN SM JST 2P", Manufacturer Part Number 1=S2B-PH-SM4-TB(LF)(SN), Mfr_Name=JST, ADAM Inventory Number 1=E00052, Copyright="Copyright (C) 2023 Ultra Librarian. All rights reserved.", RefDes=RefDes, Supplier 1="Arrow Electronics", Supplier Part Number 1=S2B-PH-SM4-TB(LF)(SN), Type=DEV
J2: library part 1050170001, "No Description Available", Mfr_Name="Molex Connector Corporation", Copyright="Copyright (C) 2023 Ultra Librarian. All rights reserved.", Manufacturer Part Number 1=1050170001, RefDes=RefDes, Type=DEV
J3: "No Description Available", Mfr_Name="Wurth Electronics", Copyright="Copyright (C) 2023 Ultra Librarian. All rights reserved.", Manufacturer Part Number 1=693071020811, RefDes=RefDes, Type=DEV
J4 J5: library part 282834-2, "TERM BLK 2P SIDE ENT 2.54MM PCB", Color=Green, Current=10A, manufacturer="TE Connectivity AMP Connectors", Supplier Part Number 1=A98333-ND, Voltage=150V, componentlink1description=Datasheet, componentlink1url=https://www.te.com/commerce/DocumentDelivery/DDEController?Action=srchrtrv&DocNm=282834&DocType=Customer+Drawing&DocLang=English, componentlink2description="DigiKey Link", componentlink2url=http://digikey.com/product-detail/en/te-connectivity-amp-connectors/282834-2/A98333-ND/1150135, lastupdated="2020-01-15 04:15:38", Lifecycle Status=Active, Mating Orientation="Horizontal with Board", Minimum Order=1, Mounting Type="Through Hole", Number of Levels=1, packaging=Bulk, Part Number=282834-2, Part Status=Active, Pitch="0.100\" (2.54mm)", Positions Per Level=2, price=0.88, series=Buchanan, Supplier 1=DigiKey, Wire Gauge="16-30 AWG", Wire Termination="Screw - Rising Cage Clamp"
JP1: library part "HEADER 6"
JP5: library part "HEADER 20X2"
MTH1: library part ANTENNA
Q1 Q2: "TRANS NPN 40V 0.6A SC75-3", Current - Collector (Ic) (Max)=600mA, DC Current Gain (hFE) (Min) @ Ic, Vce="100 @ 150mA, 10V", Frequency - Transition=300MHz, manufacturer="ON Semiconductor", Operating Temperature="-55°C ~ 150°C (TJ)", Package / Case="SC-75, SOT-416", Power - Max=150mW, Supplier Part Number 1=MMBT2222ATT1GOSCT-ND, Voltage - Collector Emitter Breakdown (Max)=40V, componentlink1description=Datasheet, componentlink1url=http://www.onsemi.com/pub/Collateral/MMBT2222ATT1-D.PDF, componentlink2description="DigiKey Link", componentlink2url=http://digikey.com/product-detail/en/on-semiconductor/MMBT2222ATT1G/MMBT2222ATT1GOSCT-ND/1967146, lastupdated="2023-03-27 20:07:05", Lifecycle Status=Active, Manufacturer Part Number 1=MMBT2222ATT1G, Minimum Order=1, Mounting Type="Surface Mount", packaging=TapeAndReel, Part Number=MMBT2222ATT1G, Part Status=Active, partid=32, price=0.02, series=-, Supplier 1=DigiKey, Supplier Device Package="SC-75, SOT-416", Transistor Type=NPN, Vce Saturation (Max) @ Ib, Ic="1V @ 50mA, 500mA"
Q3: library part "TRANS NPN 40V", "TRANS NPN 40V 0.6A SOT-723", Current - Collector (Ic) (Max)=600mA, Current - Collector Cutoff (Max)="10nA (ICBO)", DC Current Gain (hFE) (Min) @ Ic, Vce="100 @ 150mA, 10V", Frequency - Transition=300MHz, manufacturer="ON Semiconductor", Operating Temperature="-55°C ~ 150°C (TJ)", Package / Case=SOT-723, Power - Max=640mW, Supplier Part Number 1=MMBT2222AM3T5GOSCT-ND, Voltage - Collector Emitter Breakdown (Max)=40V, ADAM Inventory Number 1=E00007, componentlink1description=Datasheet, componentlink1url=http://www.onsemi.com/pub/Collateral/MMBT2222AM3-D.PDF, componentlink2description="DigiKey Link", componentlink2url=http://digikey.com/product-detail/en/on-semiconductor/MMBT2222AM3T5G/MMBT2222AM3T5GOSCT-ND/3487571, lastupdated="2023-03-28 20:16:11", Lifecycle Status=Active, Manufacturer Part Number 1=MMBT2222AM3T5G, Minimum Order=1, Mounting Type="Surface Mount", packaging=TapeAndReel, Part Status=Active, partid=22, price=0.03, series=-, Supplier 1=DigiKey, Supplier Device Package=SOT-723, Transistor Type=NPN, Vce Saturation (Max) @ Ib, Ic="1V @ 50mA, 500mA"
Q4: "No Description Available", Mfr_Name=Infineon, Manufacturer Part Number 1=IRFR5305TRLPBF
R1 R2 R3 R5 R23 R24: library part CPF0603B100KE, "RES SMD 100K OHM 0.1% 1/16W 0603", Device Package="0603 (1608 Metric)", manufacturer="TE Connectivity Passive Product", Operating Temperature="-55°C ~ 155°C", Power (Watts)="0.063W, 1/16W", Resistance="100 kOhms", Supplier Device Package=0603, Supplier Part Number 1=A119912CT-ND, Temperature Coefficient=±25ppm/°C, Tolerance=±0.1%, componentlink1description=Datasheet, componentlink1url=https://www.te.com/commerce/DocumentDelivery/DDEController?Action=srchrtrv&DocNm=1773200&DocType=DS&DocLang=English, componentlink2description="DigiKey Link", componentlink2url=https://www.digikey.com/en/products/detail/te-connectivity-passive-product/CPF0603B100KE/2381864, Composition="Thin Film", Height - Seated (Max)="0.022\" (0.55mm)", lastupdated="2023-03-22 19:30:13", Lifecycle Status=Active, Manufacturer Part Number 1=CPF0603B100KE, Minimum Order=1, Number of Terminations=2, Package / Case="0603 (1608 Metric)", packaging=TapeAndReel, Part Number=CPF0603B100KE, Part Status=Active, partid=4883, price=0.09, series="CPF, Neohm", Size / Dimension="0.061\" L x 0.031\" W (1.55mm x 0.80mm)", Supplier 1=DigiKey
R4 R10 R14 R15: library part CPF0603B1K0E, "RES SMD 1K OHM 0.1% 1/16W 0603", Device Package="0603 (1608 Metric)", manufacturer="TE Connectivity Passive Product", Operating Temperature="-55°C ~ 155°C", Power (Watts)="0.063W, 1/16W", Resistance="1 kOhms", Supplier Device Package=0603, Supplier Part Number 1=A119887CT-ND, Temperature Coefficient=±25ppm/°C, Tolerance=±0.1%, componentlink1description=Datasheet, componentlink1url=https://www.te.com/commerce/DocumentDelivery/DDEController?Action=srchrtrv&DocNm=1773200&DocType=DS&DocLang=English, componentlink2description="DigiKey Link", componentlink2url=https://www.digikey.com/en/products/detail/te-connectivity-passive-product/CPF0603B1K0E/2390473, Composition="Thin Film", Height - Seated (Max)="0.022\" (0.55mm)", lastupdated="2023-03-28 19:30:06", Lifecycle Status=Active, Manufacturer Part Number 1=CPF0603B1K0E, Minimum Order=1, Number of Terminations=2, Package / Case="0603 (1608 Metric)", packaging=TapeAndReel, Part Number=CPF0603B1K0E, Part Status=Active, partid=4877, price=0.09, series="CPF, Neohm", Size / Dimension="0.061\" L x 0.031\" W (1.55mm x 0.80mm)", Supplier 1=DigiKey
R6 R7 R8: library part RNCS0603BKE10K0, "RES 10K OHM 0.1% 1/16W 0603", Device Package="0603 (1608 Metric)", manufacturer="Stackpole Electronics Inc", Operating Temperature="-55°C ~ 155°C", Power (Watts)="0.063W, 1/16W", Ratings=AEC-Q200, Resistance="10 kOhms", Supplier Device Package=0603, Supplier Part Number 1=RNCS0603BKE10K0CT-ND, Temperature Coefficient=±25ppm/°C, Tolerance=±0.1%, componentlink1description=Datasheet, componentlink1url=https://www.seielect.com/catalog/sei-rncs_rnch.pdf, componentlink2description="DigiKey Link", componentlink2url=https://www.digikey.com/en/products/detail/stackpole-electronics-inc/RNCS0603BKE10K0/1708836, Composition="Thin Film", Features="Anti-Corrosive, Automotive AEC-Q200, Moisture Resistant", Height - Seated (Max)="0.022\" (0.55mm)", lastupdated="2023-03-27 19:26:50", Lifecycle Status=Active, Manufacturer Part Number 1=RNCS0603BKE10K0, Minimum Order=1, Number of Terminations=2, Package / Case="0603 (1608 Metric)", packaging=TapeAndReel, Part Number=RNCS0603BKE10K0, Part Status=Active, partid=4838, price=0.07, series=RNCS, Size / Dimension="0.061\" L x 0.031\" W (1.55mm x 0.80mm)", Supplier 1=DigiKey
R9 R11 R12 R13: library part RT0603FRE074K7L, "RES SMD 4.7K OHM 1% 1/10W 0603", Device Package="0603 (1608 Metric)", manufacturer=Yageo, Operating Temperature="-55°C ~ 155°C", Power (Watts)="0.1W, 1/10W", Resistance="4.7 kOhms", Supplier Device Package=0603, Supplier Part Number 1=YAG1238CT-ND, Temperature Coefficient=±50ppm/°C, Tolerance=±1%, componentlink1description=Datasheet, componentlink1url=https://www.yageo.com/upload/media/product/productsearch/datasheet/rchip/PYu-RT_1-to-0.01_RoHS_L_11.pdf, componentlink2description="DigiKey Link", componentlink2url=https://www.digikey.com/en/products/detail/yageo/RT0603FRE074K7L/1075404, Composition="Thin Film", Height - Seated (Max)="0.022\" (0.55mm)", lastupdated="2023-03-28 19:30:03", Lifecycle Status=Active, Manufacturer Part Number 1=RT0603FRE074K7L, Minimum Order=1, Number of Terminations=2, Package / Case="0603 (1608 Metric)", packaging=TapeAndReel, Part Number=RT0603FRE074K7L, Part Status=Active, partid=5678, price=0.01, series=RT, Size / Dimension="0.063\" L x 0.031\" W (1.60mm x 0.80mm)", Supplier 1=DigiKey
R16 R17 R18: library part RMCF0603FT4K70, "RES 4.7K OHM 1% 1/10W 0603", Device Package="0603 (1608 Metric)", manufacturer="Stackpole Electronics Inc", Operating Temperature="-55°C ~ 155°C", Power (Watts)="0.1W, 1/10W", Ratings=AEC-Q200, Resistance="4.7 kOhms", Supplier Device Package=0603, Supplier Part Number 1=RMCF0603FT4K70CT-ND, Temperature Coefficient=±100ppm/°C, Tolerance=±1%, componentlink1description=Datasheet, componentlink1url=https://www.seielect.com/catalog/sei-rmcf_rmcp.pdf, componentlink2description="DigiKey Link", componentlink2url=https://www.digikey.com/en/products/detail/stackpole-electronics-inc/RMCF0603FT4K70/1760998, Composition="Thick Film", Features="Automotive AEC-Q200", Height - Seated (Max)="0.022\" (0.55mm)", lastupdated="2023-04-04 19:29:43", Lifecycle Status=Active, Minimum Order=1, Number of Terminations=2, Package / Case="0603 (1608 Metric)", packaging=CutTape, Part Number=RMCF0603FT4K70, Part Status=Active, partid=6078, price=0.01, series=RMCF, Size / Dimension="0.061\" L x 0.031\" W (1.55mm x 0.80mm)", Supplier 1=DigiKey
R19: library part MCT0603MD1500BP100, "RES SMD 150 OHM 0.1% 1/8W 0603", Device Package="0603 (1608 Metric)", manufacturer="Vishay Beyschlag", Operating Temperature="-55°C ~ 155°C", Power (Watts)="0.125W, 1/8W", Ratings=AEC-Q200, Resistance="150 Ohms", Supplier Device Package=0603, Supplier Part Number 1=MCT0603-150-MBCT-ND, Temperature Coefficient=±25ppm/°C, Tolerance=±0.1%, componentlink1description=Datasheet, componentlink1url=http://www.vishay.com/docs/28785/mcat_pre.pdf, componentlink2description="DigiKey Link", componentlink2url=http://digikey.com/product-detail/en/vishay-beyschlag/MCT0603MD1500BP100/MCT0603-150-MBCT-ND/2092134, Composition="Thin Film", Features="Anti-Sulfur, Automotive AEC-Q200", Height - Seated (Max)="0.022\" (0.55mm)", lastupdated="2023-04-04 19:29:46", Lifecycle Status=Active, Minimum Order=1, Number of Terminations=2, Package / Case="0603 (1608 Metric)", packaging=TapeAndReel, Part Number=MCT0603MD1500BP100, Part Status=Active, partid=5246, price=0.23, series="MCT AT - Precision", Size / Dimension="0.061\" L x 0.033\" W (1.55mm x 0.85mm)", Supplier 1=DigiKey
R20: library part RCS060380K6FKEA, "RES SMD 80.6K OHM 1% 1/4W 0603", Device Package="0603 (1608 Metric)", manufacturer="Vishay Dale", Operating Temperature="-55°C ~ 155°C", Power (Watts)="0.25W, 1/4W", Ratings=AEC-Q200, Resistance="80.6 kOhms", Supplier Device Package=0603, Supplier Part Number 1=541-RCS060380K6FKEACT-ND, Temperature Coefficient=±100ppm/°C, Tolerance=±1%, componentlink1description=Datasheet, componentlink1url=https://www.vishay.com/docs/20065/rcse3.pdf, componentlink2description="DigiKey Link", componentlink2url=https://www.digikey.com/en/products/detail/vishay-dale/RCS060380K6FKEA/5868691, Composition="Thick Film", Features="Automotive AEC-Q200, Pulse Withstanding", Height - Seated (Max)="0.020\" (0.50mm)", lastupdated="2023-04-04 19:27:58", Lifecycle Status=Active, Minimum Order=1, Number of Terminations=2, Package / Case="0603 (1608 Metric)", packaging=TapeAndReel, Part Number=RCS060380K6FKEA, Part Status=Active, partid=62631, price=0.02, series="RCS e3", Size / Dimension="0.061\" L x 0.033\" W (1.55mm x 0.85mm)", Supplier 1=DigiKey
R21 R22: library part CMP0603AFX-1003ELF, "RESHIGHPOWERA 0603 100K 1% 1/4W", Device Package="0603 (1608 Metric)", manufacturer="Bourns Inc.", Operating Temperature="-55°C ~ 155°C", Power (Watts)="0.25W, 1/4W", Ratings=AEC-Q200, Resistance="100 kOhms", Supplier Device Package=0603, Supplier Part Number 1=118-CMP0603AFX-1003ELFCT-ND, Temperature Coefficient=±100ppm/°C, Tolerance=±1%, componentlink1description=Datasheet, componentlink1url=https://www.bourns.com/docs/Product-Datasheets/CMP-A.pdf, componentlink2description="DigiKey Link", componentlink2url=https://www.digikey.com/en/products/detail/bourns-inc/CMP0603AFX-1003ELF/12333642, Composition="Thick Film", Features="Anti-Sulfur, Automotive AEC-Q200, Moisture Resistant, Pulse Withstanding", Height - Seated (Max)="0.022\" (0.55mm)", lastupdated="2023-04-04 19:28:10", Lifecycle Status=Active, Minimum Order=1, Number of Terminations=2, Package / Case="0603 (1608 Metric)", packaging=TapeAndReel, Part Number=CMP0603AFX-1003ELF, Part Status=Active, partid=64150, price=0.03, series=CMP-A, Size / Dimension="0.063\" L x 0.031\" W (1.60mm x 0.80mm)", Supplier 1=DigiKey
S1 S2 S3 S5: "SWITCH TACTILE SPST-NO 50MA 32V", Contact Rating @ Voltage="0.05A @ 32VDC", manufacturer=C&K, Operating Force=400gf, Operating Temperature="-40°C ~ 85°C", Supplier Part Number 1=CKN10688CT-ND, Actuator Height off PCB, Vertical=2.50mm, Actuator Orientation="Top Actuated", Actuator Type=Standard, Circuit=SPST-NO, componentlink1description=Datasheet, componentlink1url=https://dznh3ojzb2azq.cloudfront.net/products/Tactile/KMR7/documents/datasheet.pdf, componentlink2description="DigiKey Link", componentlink2url=http://digikey.com/product-detail/en/c-k/KMR741NG-ULC-LFS/CKN10688CT-ND/6035360, Illumination=Non-Illuminated, Ingress Protection="IP67 - Dust Tight, Waterproof", lastupdated="2020-04-09 10:01:05", Lifecycle Status=Active, Minimum Order=1, Mounting Type="Surface Mount", Outline="4.20mm x 2.80mm", packaging=TapeAndReel, Part Number="KMR741NG ULC LFS", Part Status=Active, price=0.16, series=KMR7, Supplier 1=DigiKey, Switch Function=Off-Mom, Termination Style="Gull Wing"
  S1 S2 S3: Manufacturer Part Number 1="KMR741NG ULC LFS"
S4: "SMT 8.7 X 3.0 MM MINI SLIDE SWIT", Current Rating (Amps)="300mA (DC)", manufacturer="Würth Elektronik", Operating Temperature="-40°C ~ 85°C", Rated Current=300mA, Rated Voltage=5VDC, Supplier Part Number 1=732-450405020524CT-ND, Voltage Rating - DC="5 V", Actuator Length=2.00mm, Actuator Type=Standard, Circuit=SPDT, componentlink1description=Datasheet, componentlink1url=https://www.we-online.com/catalog/datasheet/450405020524.pdf, componentlink2description="DigiKey Link", componentlink2url=https://www.digikey.com/en/products/detail/würth-elektronik/450405020524/11627297, Contact Finish=Silver, Contact Material="Copper Alloy", Contact Plating=Silver, Contact Timing="Non-Shorting (BBM)", lastupdated="2022-06-20 13:21:27", Lifecycle Status=Active, Minimum Order=1, Mounting Technology=SMT, Mounting Type="Surface Mount", packaging=TapeAndReel, Part Number=450405020524, Part Status=Active, partid=4, price=0.73, Published Date="November 2019", Publisher="Wurth Elektronik", series=WS-SLSU, Size=8.7x3mm, Supplier 1=DigiKey, Switch Function=On-On, Switching Function=On-On, Terminal Material="Copper Alloy", Terminal Plating=Silver, Termination Style="SMD (SMT) Tab"
U1: library part "REG LIN 3.3V", "REG LINEAIRE 3.3V", Supplier Part Number 1=8043011, ADAM Inventory Number 1=E00030, Manufacturer Part Number 1=AP2112K-3.3TRG1, Supplier 1="Future Electronics"
U2: "No Description Available", Mfr_Name="Silicon Labs", Copyright="Copyright (C) 2023 Ultra Librarian. All rights reserved.", Manufacturer Part Number 1=CP2104-F03-GMR, RefDes=RefDes, Type=DEV
U3: "No Description Available", Mfr_Name="Espressif Systems", Copyright="Copyright (C) 2023 Ultra Librarian. All rights reserved.", Manufacturer Part Number 1="ESP32-WROOM-32 (8MB)", RefDes=RefDes, Type=DEV
U4: "No Description Available", Mfr_Name=Honeywell, Copyright="Copyright (C) 2023 Ultra Librarian. All rights reserved.", Manufacturer Part Number 1=MCP73831T-2ACI/OT, RefDes=RefDes, Type=DEV
U5: "Voice Record/Playback IC Multiple Message 40 ~ 120 Sec Pushbutton, SPI 28-SOIC", Supplier Part Number 1=ISD1760SY-ND, Manufacturer Part Number=ISD1760SY, Supplier 1=Digi-Key

## Via types
v1: diameter 20, hole 10, Top Layer to Bottom Layer, 146 vias
v2: diameter 50, hole 28, Top Layer to Bottom Layer, 20 vias

## Nets (pads, with @x,y where several pads share a name; then routed paths per layer and width w, separated by ;. In a path a pad name is that pad's centre, name@x,y a point inside that pad or via, vN(x,y) a via of type N, cw(c..) or ccw(c..) an arc to the next point about the centre after c; other vN are vias at no path point)
3.3V: C2.2 C3.2 C5.2 C6.2 C9.2 C10.2 R6.2 R11.2 R12.2 U1.4 U2.5 U2.6 U2.7 U3.2 | length 5268.2
  Top Layer w10: C10.2@545.78,2754.39 C10.2@547.01,2753.16 ; 1137.49,1517.13 1168.41,1486.21 1201.04,1486.21 ; 1137.69,1535.33 1167.12,1505.9 U2.5@1220.95,1505.9 ; U2.6@1220.95,1486.21 1209.95,1486.21 1201.04,1486.21 ; C5.2@1228.28,1389.84 1228.28,1443.12 1242.09,1456.93 U2.7@1250.23,1456.93 ; 1235.18,1452.06 1201.04,1486.21 ; v2@1246.39,2755.91 1252.29,2750 v2(1255,2750) ; R11.2@1557.18,2754.46 R11.2@1557.18,2756.42 ; v2(1604.33,2706.69) 1613.31,2706.69 v2@1615,2705
  Top Layer w20: R6.2@274.95,1635.81 274.95,1684.95 375.51,1785.51 438.14,1785.51 v2(440.51,1783.14) 528.65,1695 721.83,1695 728.2,1701.37 1107.98,1701.37 1137.49,1671.87 1137.49,1517.13 ; v2(471.16,2776.52) 479.28,2776.52 498.06,2757.73 542.44,2757.73 C10.2@545.78,2754.39 707.15,2754.39 U3.2@708.66,2755.91 v2@1246.39,2755.91 ; U1.4@1062.3,939.14 1063.29,938.16 1063.29,908.77 1100.12,871.94 1144.71,871.94 ; C3.2@1170.81,871.94 1144.71,871.94 ; C2.2@1170.81,1057.74 1142.74,1057.74 1115,1030 ; C5.2@1224.61,1400 1224.61,1204.61 1115,1095 1115,1030 ; C5.2@1228.28,1389.84 C6.2@1321.04,1389.84 ; C9.2@1556.2,2387.42 1652.42,2387.42 1680,2415 1680,2520 1652.88,2547.12 R12.2@1557.18,2547.12 R11.2@1557.18,2754.46 ; R11.2@1557.18,2756.42 1593.57,2756.43 1615,2735 v2@1615,2705 ; 1115,1030 1115,901.65 1144.71,871.94
  Bottom Layer w20: v2(440.51,1783.14) 440.51,1791.25 412.45,1819.32 412.45,2462.97 443.54,2494.06 443.54,2740.78 471.16,2768.4 v2(471.16,2776.52) ; v2(1255,2750) 1300,2705 1301.69,2706.69 v2(1604.33,2706.69)
5V: C16.2 C17.1 C18.2 C19.1 C20.2 C21.1 D1.2 D7.1 J3.6 JP1.5 JP1.6 JP5.3 JP5.4 JP5.37 JP5.38 JP6.1 R13.2 R14.2 R15.2 R16.2 R21.2 U5.1 U5.14 U5.21 | length 14142.1
  Top Layer w10: v2(1062.26,689.38) 1063.24,690.36 1063.24,781.77 D1.2@1064.23,782.75
  Top Layer w20: JP6.1@81.02,1845.2 85.67,1840.55 v2(324.8,1840.55) ; v2(560.08,602.7) 562.22,600.56 690.78,600.56 v2(692.91,598.43) ; R13.2@1009.22,179.36 v2@1009.22,238.83 ; v2(1075,345) 1110,310 2252.99,310 2365.35,197.64 JP1.5@2365.35,78.74 2814.96,78.74 2858.66,122.44 2858.66,394.9 ; R15.2@1972.44,3035.43 2314.96,3035.43 2338.58,3059.06 2596.46,3059.06 2663.39,2992.13 C17.1@2673.23,2992.13 ; R16.2@2145.67,2246.06 2145.67,2185.04 2188.98,2141.73 2610.24,2141.73 2668.72,2200.22 2668.72,2228.5 2697.01,2228.5 2697.83,2229.33 C19.1@2697.83,2244.09 ; v2(2594.49,2917.32) 2692.78,2917.32 2767.39,2991.93 ; C19.1@2673.23,2244.09 C19.1@2697.83,2244.09 ; C17.1@2673.42,2991.93 2767.39,2991.93 ; C19.1@2697.83,2249.74 C19.1@2697.83,2246.05 ; v2(2716.54,2135.83) 2720.67,2139.96 2720.67,2190.83 2730.67,2200.83 2730.67,2246.05 ; U5.1@2834.65,2984.65 2833.23,2986.06 2773.25,2986.06 2767.39,2991.93 ; 2858.66,667.36 2858.66,394.9 ; C16.2@2895.39,2250 2857.15,2250 2834.65,2272.5 ; U5.21@3203.94,2634.65 3205.36,2633.23 3280.16,2633.23 3307.09,2606.3 3456.3,2606.3 ; C21.1@3376.54,2246.5 3296.5,2246.5 3259.43,2209.43 3151.81,2209.43 3097.37,2155 2890,2155 2834.65,2210.35 2834.65,2272.5 ; C21.1@3376.54,2250.26 3430.26,2250.26 3502.83,2322.83 3572.83,2322.83 ; R21.2@3749.78,2397.78 3745.99,2401.57 3700.79,2401.57 ; JP5.37@3800.79,497.24 2961,497.24 2858.66,394.9 ; JP5.3@3800.79,2197.24 3649.21,2197.24 3622.05,2224.41 3622.05,2273.62 3572.83,2322.83 ; D7.1@3806.78,3051.56 3721.56,3051.56 3533.65,2863.65 C20.2@3533.65,2799.89 3532.69,2798.93 3532.69,2756.96 3486.19,2710.46 3486.19,2668.48 C18.2@3484.43,2666.73 3484.43,2634.43 3456.3,2606.3 ; C19.1@2697.83,2244.09 C19.1@2697.83,2246.05 ; C19.1@2697.83,2246.05 2730.67,2246.05 ; 2730.67,2246.05 2767.72,2283.1 2767.72,2322.93 2779.43,2334.65 U5.14@2834.65,2334.65 2834.65,2272.5 ; 3456.3,2606.3 3692.91,2606.3 3700.79,2598.43 3700.79,2401.57 ; 3572.83,2322.83 3622.05,2322.83 3700.79,2401.57
  Bottom Layer w20: v2(324.8,1840.55) 324.8,1336.61 334.65,1326.77 410,1251.41 410,870 560.08,719.92 v2(560.08,602.7) ; v2(692.91,598.43) 748.03,598.43 801.46,545 917.88,545 1011.25,638.37 ; v2(1011.25,240.86) 1011.25,408.75 ; v2(1062.26,689.38) 1011.25,638.37 ; v2(1075,345) 1011.25,408.75 ; v2(2594.49,2917.32) 2594.49,2662.29 2691.76,2565.02 2691.76,2410.16 2712.87,2389.04 2712.87,2387.54 2720.67,2379.74 2720.67,2139.96 v2(2716.54,2135.83) ; JP5.37@3800.79,497.24 3912.6,497.24 3966.54,551.18 3966.54,1653.54 3907.48,1712.6 3907.48,2165.35 3875.59,2197.24 JP5.3@3800.79,2197.24 ; 1011.25,408.75 1011.25,638.37
/RESET: JP6.6 U3.9 | length 652.8
  Top Layer w10: JP6.6@81.02,2345.2 295.64,2345.2 351.69,2401.26 704.01,2401.26 U3.9@708.66,2405.91
A1_DAC1: JP4.11 U3.10 | length 3893
  Top Layer w10: v1(467.13,2350) 702.76,2350 U3.10@708.66,2355.91 ; v1(640,1740) 650,1750 1455.28,1750 1668.65,1536.63 2064.98,1536.63 v1(2066.06,1537.7)
  Bottom Layer w10: v1(467.13,2350) 467.13,1902.87 630,1740 v1(640,1740) ; JP4.11@1796.63,2868.66 1886.06,2779.23 1886.06,2618.65 2066.06,2438.65 v1(2066.06,1537.7)
A3_IO39: JP4.9 U3.5 | length 3647.5
  Top Layer w10: v1(511.1,2565.48) 551.53,2605.91 U3.5@708.66,2605.91 ; v1(640,1800) 640.52,1800 650.52,1790 1498.79,1790 1674.32,1614.47 v1(2026.92,1614.47)
  Bottom Layer w10: v1(511.1,2565.48) 510,2564.38 510,1930 v1(640,1800) ; JP4.9@1796.63,2668.66 1856.06,2609.23 1856.06,2606.22 1943.49,2518.79 1943.49,1836.04 2026,1753.52 2026,1615.39 v1(2026.92,1614.47)
A4_IO36: JP6.11 U3.4 | length 778
  Top Layer w10: JP6.11@81.02,2845.2 392.99,2845.2 433.07,2805.12 433.07,2703.27 495.27,2641.06 623.35,2641.06 638.19,2655.91 U3.4@708.66,2655.91
BATLEVEL: R1.1 R2.2 U3.7 | length 2368.3
  Top Layer w10: v1(613.44,2496.62) 616.15,2496.62 626.27,2506.74 U3.7@701.64,2506.74 ; v1(640,2010) 701.06,1948.94 1531.06,1948.94 1575.62,1904.38 1575.62,1896.66 1621.89,1850.39 v1(1633.86,1850.39) ; v1(1620.29,1432.2) 1638.66,1432.2 1663.39,1407.48 1663.39,1334.18 1626.96,1297.76 R2.2@1624.99,1297.76 ; R1.1@1626.04,1196.57 R2.2@1626.04,1296.71
  Bottom Layer w10: v1(613.44,2496.62) 615.08,2494.99 615.08,2443.98 610,2438.91 610,2040 v1(640,2010) ; v1(1620.29,1432.2) 1621.72,1433.63 1621.72,1847.7 1624.4,1850.39 v1(1633.86,1850.39)
BL_CONTROL: JP5.14 U3.8 | length 4007.9
  Top Layer w10: v1(535,2455) 707.76,2455 U3.8@708.66,2455.91 ; v1(680,1840) 1517.19,1840 1694.27,1662.91 2048.59,1662.91 2095.44,1616.06 3623.94,1616.06 3700.79,1692.91 JP5.14@3700.79,1697.24
  Bottom Layer w10: v1(535,2455) 535,2402.9 535,2343.5 550,2328.5 550,1954.52 623.57,1880.96 639.04,1880.96 v1(680,1840)
"CD SW1": CR6.2 J3.9 JP3.2 JP6.10 U3.26 | length 5508.6
  Top Layer w10: JP6.10@81.02,2745.2 358.91,2745.2 418.07,2686.04 418.07,2685.34 477.34,2626.06 478.05,2626.06 v1(492.94,2611.17) ; v1(680,1880) 1511.84,1880 v1(1547.51,1844.33) ; U3.26@1377.95,2205.91 1450.25,2205.91 1490.8,2165.35 v1(1535.43,2165.35) ; v1(1559.06,913.39) 1576.77,895.67 2614.86,895.67 v1(2652.1,932.91) 2652.1,851.84 2726.38,777.56 ; CR6.2@2728.39,840.63 2728.39,707.08 J3.9@2728.74,706.73